# Altium PCB SU-03T-V1.6-封装.PcbDoc
Units mil, origin at the board's own origin, x right, y up, seen from the top; angles counter-clockwise.
Board outline 696.98 x 685.17 mil, 2 copper layers (Top Layer, Bottom Layer); 1 components, 0 nets, 18 pads, 0 vias.
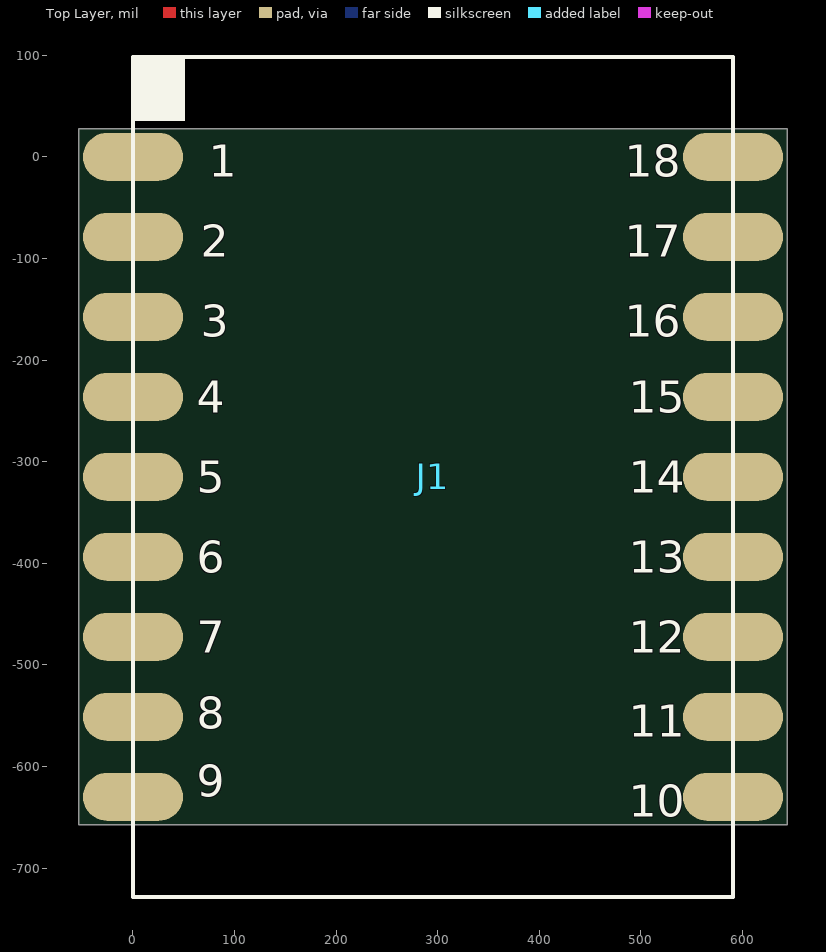
[diagram p0: Top Layer view]
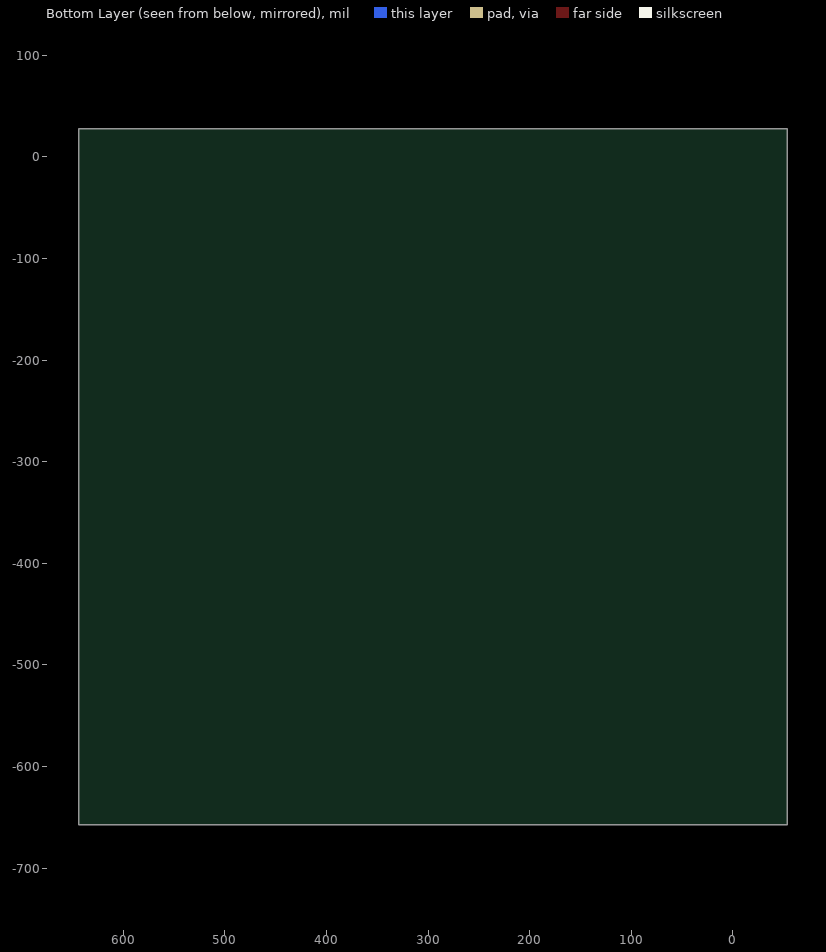
[diagram p1: Bottom Layer view, seen from below]

## Layer stack, top to bottom
Top Solder: solder mask 0.4, Solder Resist, Dk 3.5
Top Layer: signal copper 1.4
Dielectric 1: dielectric 12.6, FR-4, Dk 4.8
Bottom Layer: signal copper 1.4
Bottom Solder: solder mask 0.4, Solder Resist, Dk 3.5

## Board outline
-53.21,-657.54 643.76,-657.54 643.76,27.62 -53.21,27.62

## Design rules (kind name [scope] priority, off if disabled: settings)
Clearance [All] p1: gap=10 ignorepadtopadclearanceinfootprint=FALSE
PolygonConnect [All] p1: connectstyle=Relief reliefconductorwidth=10 reliefentries=4 polygonreliefangle="90 Angle" airgapwidth=10
RoutingVias [All] p1: holewidth=28 width=50 viastyle="Through Hole" minholewidth=28 minwidth=50 maxholewidth=28 maxwidth=50
SolderMaskExpansion [All] p1: expansion=4 istentingtop=FALSE
Width [All] p1: maxlimit=10 minlimit=10 preferedwidth=10
30 further rules are at their usual default settings.

## Components (designator, comment, footprint, x,y, rotation, side; value= is the part's Value field where it differs from the comment)
J1 "18PIN" JACK_SU-03T 0,0 r0 top

## Footprints (in the part's own frame and the unit in brackets; to place one, negate y for a bottom-side part, rotate by r counter-clockwise, add the part's x,y. Pads: shape width x height; smd on the part's side, far side on the other; paste and mask are expansions set on the pad)
JACK_SU-03T [mm]
  oval 2.5x1.2 smd: 1(0,0) 2(0,-2) 3(0,-4) 4(0,-6) 5(0,-8) 6(0,-10) 7(0,-12) 8(0,-14) 9(0,-16) 14(15,-16) 15(15,-14) 16(15,-12) 17(15,-10) 18(15,-8) 19(15,-6) 20(15,-4) 21(15,-2) 22(15,0)

## Nets (pads, with @x,y where several pads share a name; then routed paths per layer and width w, separated by ;. In a path a pad name is that pad's centre, name@x,y a point inside that pad or via, vN(x,y) a via of type N, cw(c..) or ccw(c..) an arc to the next point about the centre after c; other vN are vias at no path point)
pads on no net: J1.1 J1.2 J1.3 J1.4 J1.5 J1.6 J1.7 J1.8 J1.9 J1.14 J1.15 J1.16 J1.17 J1.18 J1.19 J1.20 J1.21 J1.22

## Silkscreen, mask and mechanical layers (free items; w line width, h text height)
Top Overlay:
  rectangle: 0,35.43 51.18,98.42
  lines w3.94: 0,-728.35 590.55,-728.35 590.55,98.42 0,98.42 0,-728.35
  text "1" at 74.8,-19.68 h31.5
  text "18" at 484.25,-19.68 h31.5
  text "2" at 66.93,-98.43 h31.5
  text "17" at 484.25,-98.43 h31.5
  text "3" at 66.93,-177.17 h31.5
  text "16" at 484.25,-177.17 h31.5
  text "4" at 62.99,-251.97 h31.5
  text "15" at 488.19,-251.97 h31.5
  text "5" at 62.99,-330.71 h31.5
  text "14" at 488.19,-330.71 h31.5
  text "6" at 62.99,-409.45 h31.5
  text "13" at 488.19,-409.45 h31.5
  text "7" at 62.99,-488.19 h31.5
  text "12" at 488.19,-488.19 h31.5
  text "8" at 62.99,-562.99 h31.5
  text "11" at 488.19,-570.87 h31.5
  text "9" at 62.99,-629.92 h31.5
  text "10" at 488.19,-649.61 h31.5